# EAGLE board ArduinoNano LearningBot 4-21-18 (EAGLE 8.4.1)
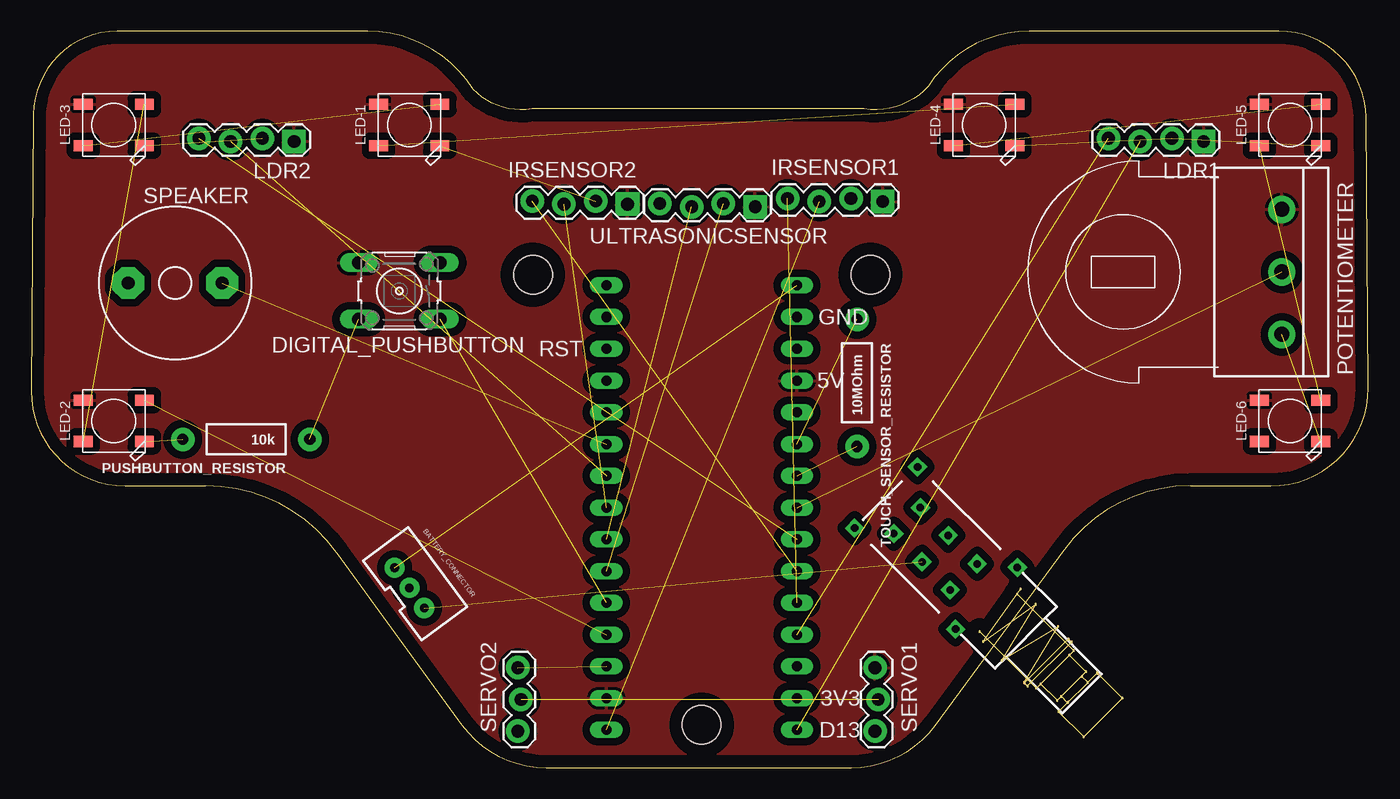
[diagram p0: board, top side]
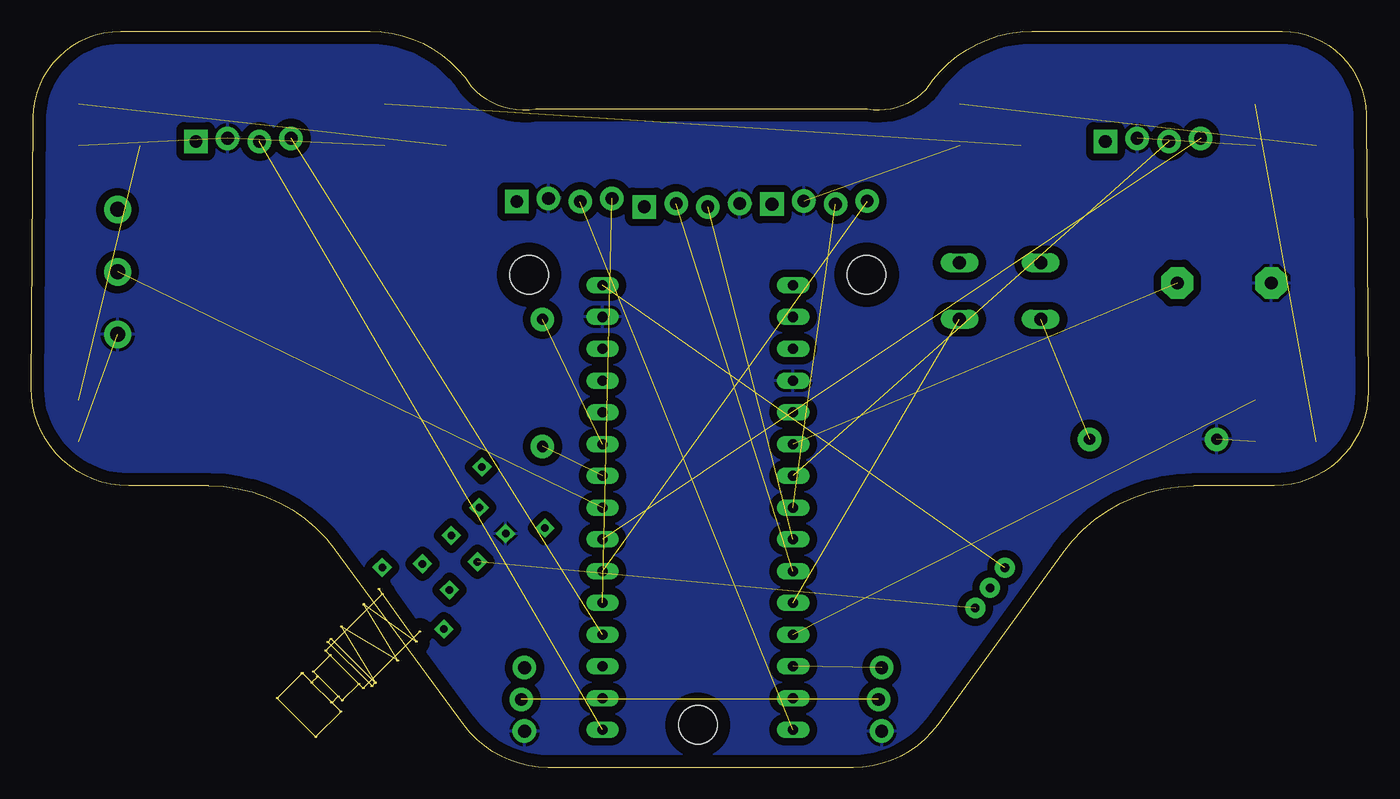
[diagram p1: board, bottom side, seen from below]

Size 106.95 x 58.88 mm. Coordinates in mm from the lower left corner, seen from the top.
Outline: 24.44,17.19 34.43,3.44 arc54 41.19,0
Outline: 24.44,17.19 arc180 24.44,17.19 arc180 24.44,17.19
Outline: 41.19,0 arc180 41.19,0
Outline: 41.19,0 65.6,0
Outline: 65.6,0 arc180 65.6,0
Outline: 41.19,0 arc180 41.19,0
Outline: 65.6,0 arc54 72.31,3.39 82.63,17.42
Outline: 65.6,0 arc180 65.6,0
Outline: 82.63,17.42 arc180 82.63,17.42
Outline: 92.74,22.53 arc54 82.63,17.42
Outline: 92.74,22.53 arc-180 92.74,22.53 arc-180 92.74,22.53
Outline: 82.63,17.42 arc180 82.63,17.42
Outline: 92.74,22.53 99.17,22.53
Outline: 99.17,22.53 arc-180 99.17,22.53 arc-180 99.17,22.53
Outline: 99.17,22.53 arc90 106.95,30.37
Outline: 106.95,30.37 arc180 106.94,30.37 arc180 106.95,30.37
Outline: 106.95,30.37 106.77,51.95
Outline: 106.77,51.95 arc-180 106.77,51.95 arc-180 106.77,51.95
Outline: 106.77,51.95 arc90 99.8,58.88
Outline: 99.8,58.88 arc-180 99.8,58.88 arc-180 99.8,58.88
Outline: 99.8,58.88 79.83,58.88 arc57 71.75,54.48 arc-57 66.62,52.68 40.04,52.68 arc-57 35.36,54.24 arc57 26.9,58.88 6.87,58.88
Outline: 6.87,58.88 arc-180 6.87,58.88 arc-180 6.87,58.88
Outline: 6.87,58.88 arc90 0.18,52.23
Outline: 0.18,52.23 arc180 0.18,52.23
Outline: 0.18,52.23 0,30.1
Outline: 0,30.1 arc-180 0,30.1 arc-180 0,30.1
Outline: 0.18,52.23 arc180 0.18,52.23
Outline: 0,30.1 arc90 7.51,22.53
Outline: 7.51,22.53 arc-180 7.51,22.53 arc-180 7.51,22.53
Outline: 7.51,22.53 13.96,22.53
Outline: 13.96,22.53 arc-180 13.96,22.53 arc-180 13.96,22.53
Outline: 24.44,17.19 arc54 13.96,22.53
Outline: 34.43,3.44 arc180 34.43,3.44 arc180 34.43,3.44
Outline: 72.32,3.39 arc180 72.31,3.4 arc180 72.32,3.39
Outline: 79.01,58.88 arc180 79.01,58.88 arc180 79.01,58.88
Outline: 27.66,58.88 arc180 27.66,58.88 arc180 27.66,58.88
Copper layers (1*16): Top 0.035mm / dielectric 1.5mm / Bottom 0.035mm
Design rules "default": minimum track width 6mil, minimum drill 0.35mm, track to track 6mil, track to pad 6mil, pad to pad 6mil, via to via 6mil, smd to smd 6mil, copper to edge 40mil, drill to drill 6mil, minimum pad ring 10mil, minimum via ring 8mil, stop-mask expansion 4mil, vias tented up to drill 0mil, thermal gap 10mil
Holes 3.1 mm at 53.63,3.41 40.13,39.41 67.13,39.41

## Footprints (pad centres in the part's own frame; a part is rotated, then mirrored left to right if it is on the bottom)
JST-3-PTH-VERT = drill 0.7 pad 1.6: 1 -2,-0.55; 2 0,-0.55; 3 2,-0.55
B3F-10XX = drill 1.016 long: 1 -3.251,2.261; 2 3.251,2.261; 3 -3.251,-2.261; 4 3.251,-2.261
1X04_LOCK = drill 1.016 pad 1.88 square: 1 0,0.127 | drill 1.016 pad 1.88: 2 2.54,-0.127; 3 5.08,0.127; 4 7.62,-0.127
WS2812B = smd 1.5 x 0.9: 1-VDD 2.45,-1.65; 2-DOUT 2.45,1.65; 3-GND -2.45,1.65; 4-DIN -2.45,-1.65
3RP/1610N-VERTICAL = drill 1.2 pad 2.184: 1 -5,0; 2 0,0; 3 5,0
PS22F03 = drill 0.6 square: 0 -3.175,5.715; 1 3.835,5.613; 2 3.81,-5.715; 3 -3.175,-5.715; C1 -1.27,0; C2 1.702,0; NC1 -1.27,-3.175; NC2 1.727,-3.226; NO1 -1.27,3.175; NO2 1.702,3.15
AXIAL-0.4 = drill 0.9 pad 1.88: P$1 -5.08,0; P$2 5.08,0
1X03_LOCK = drill 1.016 pad 1.88: 1 0,0.127; 2 2.54,-0.127; 3 5.08,0.127
AL60P = drill 1.016 pad 2.54 octagon: 1 -3.759,0; 2 3.759,0
ARDUINO-CLONE_NANO = drill 0.8 long: 3.3V -10.16,24.13; 5V -10.16,-1.27; A0 -10.16,19.05; A1 -10.16,16.51; A2 -10.16,13.97; A3 -10.16,11.43; A4 -10.16,8.89; A5 -10.16,6.35; A6 -10.16,3.81; A7 -10.16,1.27; AREF -10.16,21.59; D2 5.08,1.27; D3 5.08,3.81; D4 5.08,6.35; D5 5.08,8.89; D6 5.08,11.43; D7 5.08,13.97; D8 5.08,16.51; D9 5.08,19.05; D10 5.08,21.59; D11 5.08,24.13; D12 5.08,26.67; D13 -10.16,26.67; GND -10.16,-6.35; GND1 5.08,-1.27; RAW -10.16,-8.89; RST -10.16,-3.81; RST1 5.08,-3.81; RX1 5.08,-6.35; TX0 5.08,-8.89

## Placement (x,y rotation side)
BATTERY_CONNECTOR  [JST-3-PTH-VERT]  30.69,14.7 306.5 top
DIGITAL_PUSHBUTTON  [B3F-10XX]  29.44,38.11 180 top
IRSENSOR1  [1X04_LOCK]  68.11,45.38 180 top
IRSENSOR2  [1X04_LOCK]  47.7,45.18 180 top
LDR1  [1X04_LOCK]  93.78,50.19 180 top
LDR2  [1X04_LOCK]  21.03,50.19 180 top
LED-1  WS2812B5050  [WS2812B]  30.23,51.38 180 top
LED-2  WS2812B5050  [WS2812B]  6.6,27.72 180 top
LED-3  WS2812B5050  [WS2812B]  6.6,51.38 180 top
LED-4  WS2812B5050  [WS2812B]  76.22,51.38 180 top
LED-5  WS2812B5050  [WS2812B]  100.69,51.38 180 top
LED-6  WS2812B5050  [WS2812B]  100.69,27.72 180 top
POTENTIOMETER  [3RP/1610N-VERTICAL]  100.03,39.63 90 top
POWER_SWITCH  [PS22F03]  72.14,17.35 45 top
PUSHBUTTON_RESISTOR  10k  [AXIAL-0.4]  17.2,26.25 180 top
SERVO1  [1X03_LOCK]  67.62,2.91 90 top
SERVO2  [1X03_LOCK]  39.04,2.91 90 top
SPEAKER  SPEAKER/AL60P  [AL60P]  11.51,38.75 0 top
TOUCH_SENSOR_RESISTOR  10MOhm  [AXIAL-0.4]  66.05,30.76 270 top
U$1  ARDUINO-CLONE_NANO  [ARDUINO-CLONE_NANO]  51.08,29.68 180 top
ULTRASONICSENSOR  [1X04_LOCK]  57.9,44.97 180 top

## Library data of the parts
BATTERY_CONNECTOR SERVO1 SERVO2 = SparkFun-Connectors
DIGITAL_PUSHBUTTON = switch-omron; MPN: B3F-1000; OC_FARNELL: 176432; OC_NEWARK: 36M3542
IRSENSOR1 IRSENSOR2 LDR1 LDR2 ULTRASONICSENSOR = SparkFun-Connectors; PROD_ID: CONN-09696
LED-1-LED-6 SPEAKER = adafruit
POTENTIOMETER = pot
POWER_SWITCH U$1 = ArduinoNano LearningBot 3-15-18
PUSHBUTTON_RESISTOR TOUCH_SENSOR_RESISTOR = SparkFun-Passives

## Nets
BUTTON: DIGITAL_PUSHBUTTON.1 U$1.D8
CAP_TOUCH_RECEIVE_PIN: TOUCH_SENSOR_RESISTOR.P$1 U$1.A6
CAP_TOUCH_SEND_PIN: TOUCH_SENSOR_RESISTOR.P$2 U$1.A5
ECHO_PIN: U$1.D6 ULTRASONICSENSOR.3
GND: IRSENSOR1.2 IRSENSOR2.2 LDR1.2 LDR2.2 LED-1.3-GND LED-2.3-GND LED-3.3-GND LED-4.3-GND LED-5.3-GND LED-6.3-GND POTENTIOMETER.1 POWER_SWITCH.NO1 PUSHBUTTON_RESISTOR.P$2 SERVO1.1 SERVO2.1 SPEAKER.1 U$1.GND U$1.GND1 ULTRASONICSENSOR.4
IR_SENSOR1_AO: IRSENSOR1.4 U$1.A1
IR_SENSOR1_DO: IRSENSOR1.3 U$1.D12
IR_SENSOR2_AO: IRSENSOR2.4 U$1.A2
IR_SENSOR2_DO: IRSENSOR2.3 U$1.D5
LDR1_AO: LDR1.4 U$1.A0
LDR1_DO: LDR1.3 U$1.D13
LDR2_AO: LDR2.4 U$1.A3
LDR2_DO: LDR2.3 U$1.D4
LED-1: LED-2.4-DIN U$1.D9
N$1: LED-1.4-DIN LED-3.2-DOUT
N$2: LED-4.2-DOUT LED-5.4-DIN
N$3: DIGITAL_PUSHBUTTON.2 PUSHBUTTON_RESISTOR.P$1
N$4: LED-5.2-DOUT LED-6.4-DIN
N$5: LED-2.2-DOUT LED-3.4-DIN
N$6: LED-1.2-DOUT LED-4.4-DIN
N$9: BATTERY_CONNECTOR.3 POWER_SWITCH.C1
POTPIN: POTENTIOMETER.2 U$1.A4
RAWIN: BATTERY_CONNECTOR.1 U$1.RAW
SERVO2_PIN: SERVO2.3 U$1.D10
SERVOVCC: SERVO1.2 SERVO2.2
SPEAKERPIN: SPEAKER.2 U$1.D3
TRIG_PIN: U$1.D7 ULTRASONICSENSOR.2
VCC: DIGITAL_PUSHBUTTON.4 IRSENSOR1.1 IRSENSOR2.1 LDR1.1 LDR2.1 LED-1.1-VDD LED-2.1-VDD LED-3.1-VDD LED-4.1-VDD LED-5.1-VDD LED-6.1-VDD POTENTIOMETER.3 SERVO1.3 U$1.5V U$1.D11 ULTRASONICSENSOR.1

## Tracks (layer width: path | path; a pad name or v marks a point on that pad's centre or on a via)
BUTTON  (1 unrouted)
CAP_TOUCH_RECEIVE_PIN  (1 unrouted)
CAP_TOUCH_SEND_PIN  (1 unrouted)
ECHO_PIN  (1 unrouted)
GND  (6 unrouted)
  pour Bottom (isolate 0.61): -1.21,67.53 115.63,67.53 115.63,-2.32 -1.21,-2.32
IR_SENSOR1_AO  (1 unrouted)
IR_SENSOR1_DO  (1 unrouted)
IR_SENSOR2_AO  (1 unrouted)
IR_SENSOR2_DO  (1 unrouted)
LDR1_AO  (1 unrouted)
LDR1_DO  (1 unrouted)
LDR2_AO  (1 unrouted)
LDR2_DO  (1 unrouted)
LED-1  (1 unrouted)
N$1  (1 unrouted)
N$2  (1 unrouted)
N$3  (1 unrouted)
N$4  (1 unrouted)
N$5  (1 unrouted)
N$6  (1 unrouted)
N$9  (1 unrouted)
POTPIN  (1 unrouted)
RAWIN  (1 unrouted)
SERVO2_PIN  (1 unrouted)
SERVOVCC  (1 unrouted)
SPEAKERPIN  (1 unrouted)
TRIG_PIN  (1 unrouted)
VCC
  pour Top (isolate 0.61): -4.39,65.62 112.45,65.62 112.45,-4.23 -4.39,-4.23